# EAGLE board SparkFun_Energy_Harvester_Breakout-LTC3588_Panel_v12 (EAGLE 7.4.0), part 1 of 3
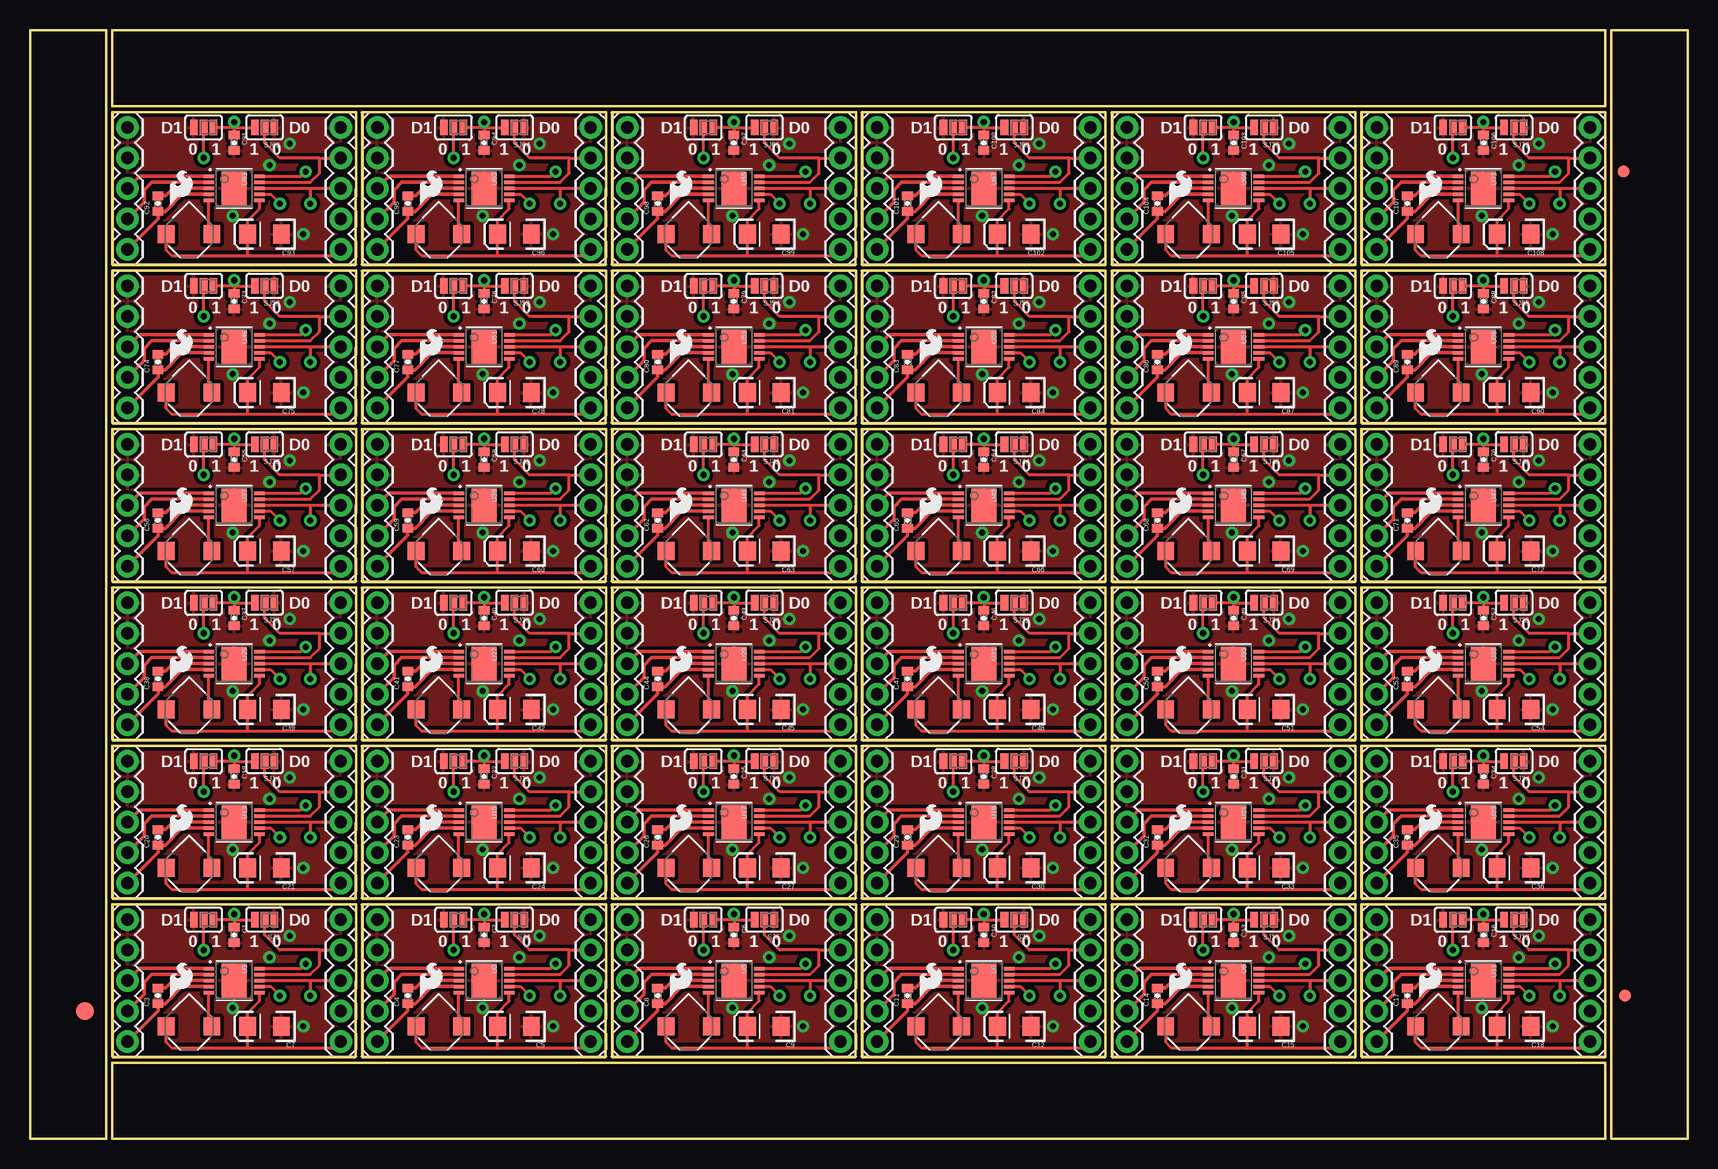
[diagram p0: board, top side]
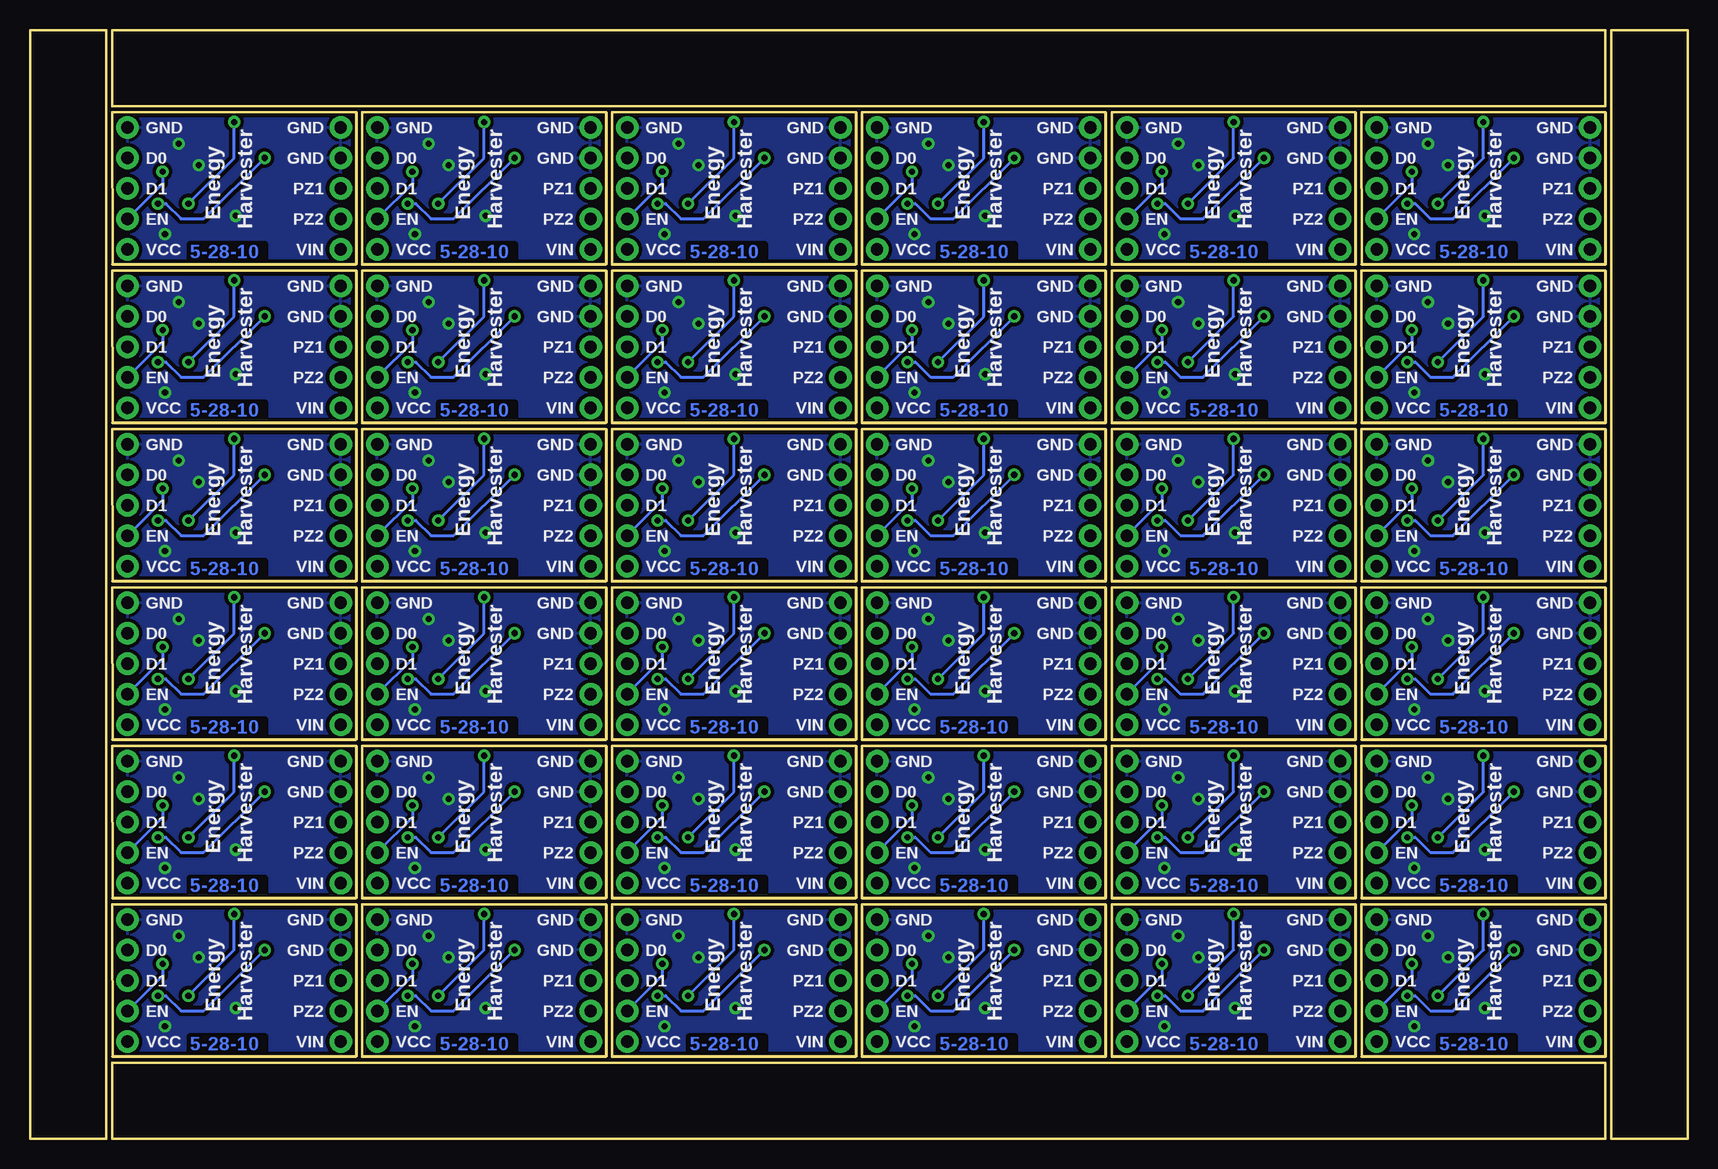
[diagram p1: board, bottom side, seen from below]

Size 138.18 x 92.46 mm. Coordinates in mm from the lower left corner, seen from the top.
Outline: 6.35,79.25 6.35,0 0,0 0,29.72
Outline: 0,27.18 0,92.46 6.35,92.46 6.35,76.71
Outline: 79.25,0 6.86,0 6.86,6.35 29.72,6.35
Outline: 27.18,6.35 131.32,6.35 131.32,0 76.71,0
Outline: 138.18,79.25 138.18,0 131.83,0 131.83,29.72
Outline: 131.83,27.18 131.83,92.46 138.18,92.46 138.18,76.71
Outline: 58.93,92.46 131.32,92.46 131.32,86.11 108.46,86.11
Outline: 111,86.11 6.86,86.11 6.86,92.46 61.47,92.46
Outline: 6.86,6.86 27.16,6.86 27.18,19.56 6.86,19.56 6.86,6.86
Outline: 27.69,6.86 47.99,6.86 48.01,19.56 27.69,19.56 27.69,6.86
Outline: 48.51,6.86 68.81,6.86 68.83,19.56 48.51,19.56 48.51,6.86
Outline: 69.34,6.86 89.64,6.86 89.66,19.56 69.34,19.56 69.34,6.86
Outline: 90.17,6.86 110.47,6.86 110.49,19.56 90.17,19.56 90.17,6.86
Outline: 111,6.86 131.3,6.86 131.32,19.56 111,19.56 111,6.86
Outline: 6.86,20.07 27.16,20.07 27.18,32.77 6.86,32.77 6.86,20.07
Outline: 27.69,20.07 47.99,20.07 48.01,32.77 27.69,32.77 27.69,20.07
Outline: 48.51,20.07 68.81,20.07 68.83,32.77 48.51,32.77 48.51,20.07
Outline: 69.34,20.07 89.64,20.07 89.66,32.77 69.34,32.77 69.34,20.07
Outline: 90.17,20.07 110.47,20.07 110.49,32.77 90.17,32.77 90.17,20.07
Outline: 111,20.07 131.3,20.07 131.32,32.77 111,32.77 111,20.07
Outline: 6.86,33.27 27.16,33.27 27.18,45.97 6.86,45.97 6.86,33.27
Outline: 27.69,33.27 47.99,33.27 48.01,45.97 27.69,45.97 27.69,33.27
Outline: 48.51,33.27 68.81,33.27 68.83,45.97 48.51,45.97 48.51,33.27
Outline: 69.34,33.27 89.64,33.27 89.66,45.97 69.34,45.97 69.34,33.27
Outline: 90.17,33.27 110.47,33.27 110.49,45.97 90.17,45.97 90.17,33.27
Outline: 111,33.27 131.3,33.27 131.32,45.97 111,45.97 111,33.27
Outline: 6.86,46.48 27.16,46.48 27.18,59.18 6.86,59.18 6.86,46.48
Outline: 27.69,46.48 47.99,46.48 48.01,59.18 27.69,59.18 27.69,46.48
Outline: 48.51,46.48 68.81,46.48 68.83,59.18 48.51,59.18 48.51,46.48
Outline: 69.34,46.48 89.64,46.48 89.66,59.18 69.34,59.18 69.34,46.48
Outline: 90.17,46.48 110.47,46.48 110.49,59.18 90.17,59.18 90.17,46.48
Outline: 111,46.48 131.3,46.48 131.32,59.18 111,59.18 111,46.48
Outline: 6.86,59.69 27.16,59.69 27.18,72.39 6.86,72.39 6.86,59.69
Outline: 27.69,59.69 47.99,59.69 48.01,72.39 27.69,72.39 27.69,59.69
Outline: 48.51,59.69 68.81,59.69 68.83,72.39 48.51,72.39 48.51,59.69
Outline: 69.34,59.69 89.64,59.69 89.66,72.39 69.34,72.39 69.34,59.69
Outline: 90.17,59.69 110.47,59.69 110.49,72.39 90.17,72.39 90.17,59.69
Outline: 111,59.69 131.3,59.69 131.32,72.39 111,72.39 111,59.69
Outline: 6.86,72.9 27.16,72.9 27.18,85.6 6.86,85.6 6.86,72.9
Outline: 27.69,72.9 47.99,72.9 48.01,85.6 27.69,85.6 27.69,72.9
Outline: 48.51,72.9 68.81,72.9 68.83,85.6 48.51,85.6 48.51,72.9
Outline: 69.34,72.9 89.64,72.9 89.66,85.6 69.34,85.6 69.34,72.9
Outline: 90.17,72.9 110.47,72.9 110.49,85.6 90.17,85.6 90.17,72.9
Outline: 111,72.9 131.3,72.9 131.32,85.6 111,85.6 111,72.9
Copper layers (1*16): Top 0.035mm / dielectric 1.5mm / Bottom 0.035mm
Design rules "SparkFun": minimum track width 8mil, minimum drill 20mil, track to track 8mil, track to pad 8mil, pad to pad 8mil, via to via 8mil, smd to smd 8mil, copper to edge 8mil, drill to drill 8mil, minimum pad ring 12mil, minimum via ring 10mil, stop-mask expansion 4mil, vias tented up to drill 20mil, thermal gap 10mil

## Footprints (pad centres in the part's own frame; a part is rotated, then mirrored left to right if it is on the bottom)
0402-CAP = smd 0.7 x 0.9: 1 -0.65,0; 2 0.65,0
EIA3216 = smd 1.4 x 1.6: A 1.4,0; C -1.4,0
FIDUCIAL-1.5X3 = smd 1.5 x 1.5: 1 0,0
FIDUCIAL-1X2 = smd 1 x 1: 1 0,0
1X05 = drill 1.016 pad 1.88: 1 0,0; 2 2.54,0; 3 5.08,0; 4 7.62,0; 5 10.16,0
SJ_3_PASTE2&3 = smd 0.635 x 1.27: 1 -0.813,0; 2 0,0; 3 0.813,0
SJ_3_PASTE1&2 = smd 0.635 x 1.27: 1 -0.813,0; 2 0,0; 3 0.813,0
MSOP-10-GNDPAD = smd 0.305 x 0.889: 1 -1,-2.11; 2 -0.5,-2.11; 3 0,-2.11; 4 0.5,-2.11; 5 1,-2.11; 6 1,2.11; 7 0.5,2.11; 8 0,2.11; 9 -0.5,2.11; 10 -1,2.11 | smd 2.794 x 2.083: GND 0,0
CDRH3D28 = smd 1.4 x 1.5: 1 -1.95,-0.007; 2 1.849,-0.007

## Placement (x,y rotation side)
C1  4.7uF  [0402-CAP]  17.02,17.02 270 top
C2  4.7uF  [0402-CAP]  37.85,17.02 270 top
C3  1uF  [0402-CAP]  10.67,11.94 90 top
C4  1uF  [0402-CAP]  31.5,11.94 90 top
C5  10uF  [EIA3216]  40.39,9.4 180 top
C6  4.7uF  [0402-CAP]  58.67,17.02 270 top
C7  10uF  [EIA3216]  19.56,9.4 180 top
C8  1uF  [0402-CAP]  52.32,11.94 90 top
C9  10uF  [EIA3216]  61.21,9.4 180 top
C10  4.7uF  [0402-CAP]  79.5,17.02 270 top
C11  1uF  [0402-CAP]  73.15,11.94 90 top
C12  10uF  [EIA3216]  82.04,9.4 180 top
C13  4.7uF  [0402-CAP]  100.33,17.02 270 top
C14  1uF  [0402-CAP]  93.98,11.94 90 top
C15  10uF  [EIA3216]  102.87,9.4 180 top
C16  4.7uF  [0402-CAP]  121.16,17.02 270 top
C17  1uF  [0402-CAP]  114.81,11.94 90 top
C18  10uF  [EIA3216]  123.7,9.4 180 top
C19  4.7uF  [0402-CAP]  17.02,30.23 270 top
C20  1uF  [0402-CAP]  10.67,25.15 90 top
C21  10uF  [EIA3216]  19.56,22.61 180 top
C22  4.7uF  [0402-CAP]  37.85,30.23 270 top
C23  1uF  [0402-CAP]  31.5,25.15 90 top
C24  10uF  [EIA3216]  40.39,22.61 180 top
C25  4.7uF  [0402-CAP]  58.67,30.23 270 top
C26  1uF  [0402-CAP]  52.32,25.15 90 top
C27  10uF  [EIA3216]  61.21,22.61 180 top
C28  4.7uF  [0402-CAP]  79.5,30.23 270 top
C29  1uF  [0402-CAP]  73.15,25.15 90 top
C30  10uF  [EIA3216]  82.04,22.61 180 top
C31  4.7uF  [0402-CAP]  100.33,30.23 270 top
C32  1uF  [0402-CAP]  93.98,25.15 90 top
C33  10uF  [EIA3216]  102.87,22.61 180 top
C34  4.7uF  [0402-CAP]  121.16,30.23 270 top
C35  1uF  [0402-CAP]  114.81,25.15 90 top
C36  10uF  [EIA3216]  123.7,22.61 180 top
C37  4.7uF  [0402-CAP]  17.02,43.43 270 top
C38  1uF  [0402-CAP]  10.67,38.35 90 top
C39  10uF  [EIA3216]  19.56,35.81 180 top
C40  4.7uF  [0402-CAP]  37.85,43.43 270 top
C41  1uF  [0402-CAP]  31.5,38.35 90 top
C42  10uF  [EIA3216]  40.39,35.81 180 top
C43  4.7uF  [0402-CAP]  58.67,43.43 270 top
C44  1uF  [0402-CAP]  52.32,38.35 90 top
C45  10uF  [EIA3216]  61.21,35.81 180 top
C46  4.7uF  [0402-CAP]  79.5,43.43 270 top
C47  1uF  [0402-CAP]  73.15,38.35 90 top
C48  10uF  [EIA3216]  82.04,35.81 180 top
C49  4.7uF  [0402-CAP]  100.33,43.43 270 top
C50  1uF  [0402-CAP]  93.98,38.35 90 top
C51  10uF  [EIA3216]  102.87,35.81 180 top
C52  4.7uF  [0402-CAP]  121.16,43.43 270 top
C53  1uF  [0402-CAP]  114.81,38.35 90 top
C54  10uF  [EIA3216]  123.7,35.81 180 top
C55  4.7uF  [0402-CAP]  17.02,56.64 270 top
C56  1uF  [0402-CAP]  10.67,51.56 90 top
C57  10uF  [EIA3216]  19.56,49.02 180 top
C58  4.7uF  [0402-CAP]  37.85,56.64 270 top
C59  1uF  [0402-CAP]  31.5,51.56 90 top
C60  10uF  [EIA3216]  40.39,49.02 180 top
C61  4.7uF  [0402-CAP]  58.67,56.64 270 top
C62  1uF  [0402-CAP]  52.32,51.56 90 top
C63  10uF  [EIA3216]  61.21,49.02 180 top
C64  4.7uF  [0402-CAP]  79.5,56.64 270 top
C65  1uF  [0402-CAP]  73.15,51.56 90 top
C66  10uF  [EIA3216]  82.04,49.02 180 top
C67  4.7uF  [0402-CAP]  100.33,56.64 270 top
C68  1uF  [0402-CAP]  93.98,51.56 90 top
C69  10uF  [EIA3216]  102.87,49.02 180 top
C70  4.7uF  [0402-CAP]  121.16,56.64 270 top
C71  1uF  [0402-CAP]  114.81,51.56 90 top
C72  10uF  [EIA3216]  123.7,49.02 180 top
C73  4.7uF  [0402-CAP]  17.02,69.85 270 top
C74  1uF  [0402-CAP]  10.67,64.77 90 top
C75  10uF  [EIA3216]  19.56,62.23 180 top
C76  4.7uF  [0402-CAP]  37.85,69.85 270 top
C77  1uF  [0402-CAP]  31.5,64.77 90 top
C78  10uF  [EIA3216]  40.39,62.23 180 top
C79  4.7uF  [0402-CAP]  58.67,69.85 270 top
C80  1uF  [0402-CAP]  52.32,64.77 90 top
C81  10uF  [EIA3216]  61.21,62.23 180 top
C82  4.7uF  [0402-CAP]  79.5,69.85 270 top
C83  1uF  [0402-CAP]  73.15,64.77 90 top
C84  10uF  [EIA3216]  82.04,62.23 180 top
C85  4.7uF  [0402-CAP]  100.33,69.85 270 top
C86  1uF  [0402-CAP]  93.98,64.77 90 top
C87  10uF  [EIA3216]  102.87,62.23 180 top
C88  4.7uF  [0402-CAP]  121.16,69.85 270 top
C89  1uF  [0402-CAP]  114.81,64.77 90 top
C90  10uF  [EIA3216]  123.7,62.23 180 top
C91  4.7uF  [0402-CAP]  17.02,83.06 270 top
C92  1uF  [0402-CAP]  10.67,77.98 90 top
C93  10uF  [EIA3216]  19.56,75.44 180 top
C94  4.7uF  [0402-CAP]  37.85,83.06 270 top
C95  1uF  [0402-CAP]  31.5,77.98 90 top
C96  10uF  [EIA3216]  40.39,75.44 180 top
C97  4.7uF  [0402-CAP]  58.67,83.06 270 top
C98  1uF  [0402-CAP]  52.32,77.98 90 top
C99  10uF  [EIA3216]  61.21,75.44 180 top
C100  4.7uF  [0402-CAP]  79.5,83.06 270 top
C101  1uF  [0402-CAP]  73.15,77.98 90 top
C102  10uF  [EIA3216]  82.04,75.44 180 top
C103  4.7uF  [0402-CAP]  100.33,83.06 270 top
C104  1uF  [0402-CAP]  93.98,77.98 90 top
C105  10uF  [EIA3216]  102.87,75.44 180 top
C106  4.7uF  [0402-CAP]  121.16,83.06 270 top
C107  1uF  [0402-CAP]  114.81,77.98 90 top
C108  10uF  [EIA3216]  123.7,75.44 180 top
E$1  [FIDUCIAL-1.5X3]  4.57,10.67 0 top
E$5  [FIDUCIAL-1X2]  132.97,11.94 0 top
E$7  [FIDUCIAL-1X2]  132.84,80.64 90 top
JP1  LOGO-SFESK  [SFE-LOGO-FLAME]  11.68,11.84 0 top
JP2  Control  [1X05]  25.91,8.13 90 top
JP3  Control  [1X05]  46.74,8.13 90 top
JP4  Input  [1X05]  8.13,8.13 90 top
JP5  Input  [1X05]  28.96,8.13 90 top
JP6  LOGO-SFESK  [SFE-LOGO-FLAME]  32.51,11.84 0 top
JP7  Control  [1X05]  67.56,8.13 90 top
JP8  Input  [1X05]  49.78,8.13 90 top
JP9  LOGO-SFESK  [SFE-LOGO-FLAME]  53.34,11.84 0 top
JP10  Control  [1X05]  88.39,8.13 90 top
JP11  Input  [1X05]  70.61,8.13 90 top
JP12  LOGO-SFESK  [SFE-LOGO-FLAME]  74.17,11.84 0 top
JP13  Control  [1X05]  109.22,8.13 90 top
JP14  Input  [1X05]  91.44,8.13 90 top
JP15  LOGO-SFESK  [SFE-LOGO-FLAME]  95,11.84 0 top
JP16  Control  [1X05]  130.05,8.13 90 top
JP17  Input  [1X05]  112.27,8.13 90 top
JP18  LOGO-SFESK  [SFE-LOGO-FLAME]  115.82,11.84 0 top
JP19  Control  [1X05]  25.91,21.34 90 top
JP20  Input  [1X05]  8.13,21.34 90 top
JP21  LOGO-SFESK  [SFE-LOGO-FLAME]  11.68,25.04 0 top
JP22  Control  [1X05]  46.74,21.34 90 top
JP23  Input  [1X05]  28.96,21.34 90 top
JP24  LOGO-SFESK  [SFE-LOGO-FLAME]  32.51,25.04 0 top
JP25  Control  [1X05]  67.56,21.34 90 top
JP26  Input  [1X05]  49.78,21.34 90 top
JP27  LOGO-SFESK  [SFE-LOGO-FLAME]  53.34,25.04 0 top
JP28  Control  [1X05]  88.39,21.34 90 top
JP29  Input  [1X05]  70.61,21.34 90 top
JP30  LOGO-SFESK  [SFE-LOGO-FLAME]  74.17,25.04 0 top
JP31  Control  [1X05]  109.22,21.34 90 top
JP32  Input  [1X05]  91.44,21.34 90 top
JP33  LOGO-SFESK  [SFE-LOGO-FLAME]  95,25.04 0 top
JP34  Control  [1X05]  130.05,21.34 90 top
JP35  Input  [1X05]  112.27,21.34 90 top
JP36  LOGO-SFESK  [SFE-LOGO-FLAME]  115.82,25.04 0 top
JP37  Control  [1X05]  25.91,34.54 90 top
JP38  Input  [1X05]  8.13,34.54 90 top
JP39  LOGO-SFESK  [SFE-LOGO-FLAME]  11.68,38.25 0 top
JP40  Control  [1X05]  46.74,34.54 90 top
JP41  Input  [1X05]  28.96,34.54 90 top
JP42  LOGO-SFESK  [SFE-LOGO-FLAME]  32.51,38.25 0 top
JP43  Control  [1X05]  67.56,34.54 90 top
JP44  Input  [1X05]  49.78,34.54 90 top
JP45  LOGO-SFESK  [SFE-LOGO-FLAME]  53.34,38.25 0 top
JP46  Control  [1X05]  88.39,34.54 90 top
JP47  Input  [1X05]  70.61,34.54 90 top
JP48  LOGO-SFESK  [SFE-LOGO-FLAME]  74.17,38.25 0 top
JP49  Control  [1X05]  109.22,34.54 90 top
JP50  Input  [1X05]  91.44,34.54 90 top
JP51  LOGO-SFESK  [SFE-LOGO-FLAME]  95,38.25 0 top
JP52  Control  [1X05]  130.05,34.54 90 top
JP53  Input  [1X05]  112.27,34.54 90 top
JP54  LOGO-SFESK  [SFE-LOGO-FLAME]  115.82,38.25 0 top
JP55  Control  [1X05]  25.91,47.75 90 top
JP56  Input  [1X05]  8.13,47.75 90 top
JP57  LOGO-SFESK  [SFE-LOGO-FLAME]  11.68,51.46 0 top
JP58  Control  [1X05]  46.74,47.75 90 top
JP59  Input  [1X05]  28.96,47.75 90 top
JP60  LOGO-SFESK  [SFE-LOGO-FLAME]  32.51,51.46 0 top
JP61  Control  [1X05]  67.56,47.75 90 top
JP62  Input  [1X05]  49.78,47.75 90 top
JP63  LOGO-SFESK  [SFE-LOGO-FLAME]  53.34,51.46 0 top
JP64  Control  [1X05]  88.39,47.75 90 top
JP65  Input  [1X05]  70.61,47.75 90 top
JP66  LOGO-SFESK  [SFE-LOGO-FLAME]  74.17,51.46 0 top
JP67  Control  [1X05]  109.22,47.75 90 top
JP68  Input  [1X05]  91.44,47.75 90 top
JP69  LOGO-SFESK  [SFE-LOGO-FLAME]  95,51.46 0 top
JP70  Control  [1X05]  130.05,47.75 90 top
JP71  Input  [1X05]  112.27,47.75 90 top
JP72  LOGO-SFESK  [SFE-LOGO-FLAME]  115.82,51.46 0 top
JP73  Control  [1X05]  25.91,60.96 90 top
JP74  Input  [1X05]  8.13,60.96 90 top
JP75  LOGO-SFESK  [SFE-LOGO-FLAME]  11.68,64.67 0 top
JP76  Control  [1X05]  46.74,60.96 90 top
JP77  Input  [1X05]  28.96,60.96 90 top
JP78  LOGO-SFESK  [SFE-LOGO-FLAME]  32.51,64.67 0 top
JP79  Control  [1X05]  67.56,60.96 90 top
JP80  Input  [1X05]  49.78,60.96 90 top
JP81  LOGO-SFESK  [SFE-LOGO-FLAME]  53.34,64.67 0 top
JP82  Control  [1X05]  88.39,60.96 90 top
JP83  Input  [1X05]  70.61,60.96 90 top
JP84  LOGO-SFESK  [SFE-LOGO-FLAME]  74.17,64.67 0 top
JP85  Control  [1X05]  109.22,60.96 90 top
JP86  Input  [1X05]  91.44,60.96 90 top
JP87  LOGO-SFESK  [SFE-LOGO-FLAME]  95,64.67 0 top
JP88  Control  [1X05]  130.05,60.96 90 top
JP89  Input  [1X05]  112.27,60.96 90 top
JP90  LOGO-SFESK  [SFE-LOGO-FLAME]  115.82,64.67 0 top
JP91  Control  [1X05]  25.91,74.17 90 top
JP92  Input  [1X05]  8.13,74.17 90 top
JP93  LOGO-SFESK  [SFE-LOGO-FLAME]  11.68,77.88 0 top
JP94  Control  [1X05]  46.74,74.17 90 top
JP95  Input  [1X05]  28.96,74.17 90 top
JP96  LOGO-SFESK  [SFE-LOGO-FLAME]  32.51,77.88 0 top
JP97  Control  [1X05]  67.56,74.17 90 top
JP98  Input  [1X05]  49.78,74.17 90 top
JP99  LOGO-SFESK  [SFE-LOGO-FLAME]  53.34,77.88 0 top
JP100  Control  [1X05]  88.39,74.17 90 top
JP101  Input  [1X05]  70.61,74.17 90 top
JP102  LOGO-SFESK  [SFE-LOGO-FLAME]  74.17,77.88 0 top
JP103  Control  [1X05]  109.22,74.17 90 top
JP104  Input  [1X05]  91.44,74.17 90 top
JP105  LOGO-SFESK  [SFE-LOGO-FLAME]  95,77.88 0 top
JP106  Control  [1X05]  130.05,74.17 90 top
JP107  Input  [1X05]  112.27,74.17 90 top
JP108  LOGO-SFESK  [SFE-LOGO-FLAME]  115.82,77.88 0 top
SJ1  D1  [SJ_3_PASTE2&3]  14.48,18.29 0 top
SJ2  D0  [SJ_3_PASTE1&2]  19.56,18.29 180 top
SJ3  D1  [SJ_3_PASTE2&3]  35.31,18.29 0 top
SJ4  D0  [SJ_3_PASTE1&2]  40.39,18.29 180 top
SJ5  D1  [SJ_3_PASTE2&3]  56.13,18.29 0 top
SJ6  D0  [SJ_3_PASTE1&2]  61.21,18.29 180 top
SJ7  D1  [SJ_3_PASTE2&3]  76.96,18.29 0 top
SJ8  D0  [SJ_3_PASTE1&2]  82.04,18.29 180 top
SJ9  D1  [SJ_3_PASTE2&3]  97.79,18.29 0 top
SJ10  D0  [SJ_3_PASTE1&2]  102.87,18.29 180 top
SJ11  D1  [SJ_3_PASTE2&3]  118.62,18.29 0 top
SJ12  D0  [SJ_3_PASTE1&2]  123.7,18.29 180 top
SJ13  D1  [SJ_3_PASTE2&3]  14.48,31.5 0 top
SJ14  D0  [SJ_3_PASTE1&2]  19.56,31.5 180 top
SJ15  D1  [SJ_3_PASTE2&3]  35.31,31.5 0 top
SJ16  D0  [SJ_3_PASTE1&2]  40.39,31.5 180 top
SJ17  D1  [SJ_3_PASTE2&3]  56.13,31.5 0 top
SJ18  D0  [SJ_3_PASTE1&2]  61.21,31.5 180 top
SJ19  D1  [SJ_3_PASTE2&3]  76.96,31.5 0 top
SJ20  D0  [SJ_3_PASTE1&2]  82.04,31.5 180 top
SJ21  D1  [SJ_3_PASTE2&3]  97.79,31.5 0 top
SJ22  D0  [SJ_3_PASTE1&2]  102.87,31.5 180 top
SJ23  D1  [SJ_3_PASTE2&3]  118.62,31.5 0 top
SJ24  D0  [SJ_3_PASTE1&2]  123.7,31.5 180 top
SJ25  D1  [SJ_3_PASTE2&3]  14.48,44.7 0 top
SJ26  D0  [SJ_3_PASTE1&2]  19.56,44.7 180 top
SJ27  D1  [SJ_3_PASTE2&3]  35.31,44.7 0 top
SJ28  D0  [SJ_3_PASTE1&2]  40.39,44.7 180 top
SJ29  D1  [SJ_3_PASTE2&3]  56.13,44.7 0 top
SJ30  D0  [SJ_3_PASTE1&2]  61.21,44.7 180 top
SJ31  D1  [SJ_3_PASTE2&3]  76.96,44.7 0 top
SJ32  D0  [SJ_3_PASTE1&2]  82.04,44.7 180 top
SJ33  D1  [SJ_3_PASTE2&3]  97.79,44.7 0 top
SJ34  D0  [SJ_3_PASTE1&2]  102.87,44.7 180 top
SJ35  D1  [SJ_3_PASTE2&3]  118.62,44.7 0 top
SJ36  D0  [SJ_3_PASTE1&2]  123.7,44.7 180 top
SJ37  D1  [SJ_3_PASTE2&3]  14.48,57.91 0 top
SJ38  D0  [SJ_3_PASTE1&2]  19.56,57.91 180 top
SJ39  D1  [SJ_3_PASTE2&3]  35.31,57.91 0 top
SJ40  D0  [SJ_3_PASTE1&2]  40.39,57.91 180 top
SJ41  D1  [SJ_3_PASTE2&3]  56.13,57.91 0 top
SJ42  D0  [SJ_3_PASTE1&2]  61.21,57.91 180 top
SJ43  D1  [SJ_3_PASTE2&3]  76.96,57.91 0 top
SJ44  D0  [SJ_3_PASTE1&2]  82.04,57.91 180 top
SJ45  D1  [SJ_3_PASTE2&3]  97.79,57.91 0 top
SJ46  D0  [SJ_3_PASTE1&2]  102.87,57.91 180 top
SJ47  D1  [SJ_3_PASTE2&3]  118.62,57.91 0 top
SJ48  D0  [SJ_3_PASTE1&2]  123.7,57.91 180 top
SJ49  D1  [SJ_3_PASTE2&3]  14.48,71.12 0 top
SJ50  D0  [SJ_3_PASTE1&2]  19.56,71.12 180 top
SJ51  D1  [SJ_3_PASTE2&3]  35.31,71.12 0 top
SJ52  D0  [SJ_3_PASTE1&2]  40.39,71.12 180 top
SJ53  D1  [SJ_3_PASTE2&3]  56.13,71.12 0 top
SJ54  D0  [SJ_3_PASTE1&2]  61.21,71.12 180 top
SJ55  D1  [SJ_3_PASTE2&3]  76.96,71.12 0 top
SJ56  D0  [SJ_3_PASTE1&2]  82.04,71.12 180 top
SJ57  D1  [SJ_3_PASTE2&3]  97.79,71.12 0 top
SJ58  D0  [SJ_3_PASTE1&2]  102.87,71.12 180 top
SJ59  D1  [SJ_3_PASTE2&3]  118.62,71.12 0 top
SJ60  D0  [SJ_3_PASTE1&2]  123.7,71.12 180 top
SJ61  D1  [SJ_3_PASTE2&3]  14.48,84.33 0 top
SJ62  D0  [SJ_3_PASTE1&2]  19.56,84.33 180 top
SJ63  D1  [SJ_3_PASTE2&3]  35.31,84.33 0 top
SJ64  D0  [SJ_3_PASTE1&2]  40.39,84.33 180 top
SJ65  D1  [SJ_3_PASTE2&3]  56.13,84.33 0 top
SJ66  D0  [SJ_3_PASTE1&2]  61.21,84.33 180 top
SJ67  D1  [SJ_3_PASTE2&3]  76.96,84.33 0 top
SJ68  D0  [SJ_3_PASTE1&2]  82.04,84.33 180 top
SJ69  D1  [SJ_3_PASTE2&3]  97.79,84.33 0 top
SJ70  D0  [SJ_3_PASTE1&2]  102.87,84.33 180 top
SJ71  D1  [SJ_3_PASTE2&3]  118.62,84.33 0 top
SJ72  D0  [SJ_3_PASTE1&2]  123.7,84.33 180 top
U1  LTC3588  [MSOP-10-GNDPAD]  17.02,13.21 270 top
U2  10uH  [CDRH3D28]  13.21,9.4 180 top
U3  LTC3588  [MSOP-10-GNDPAD]  37.85,13.21 270 top
U4  10uH  [CDRH3D28]  34.04,9.4 180 top
U5  LTC3588  [MSOP-10-GNDPAD]  58.67,13.21 270 top
U6  10uH  [CDRH3D28]  54.86,9.4 180 top
U7  LTC3588  [MSOP-10-GNDPAD]  79.5,13.21 270 top
U8  10uH  [CDRH3D28]  75.69,9.4 180 top
U9  LTC3588  [MSOP-10-GNDPAD]  100.33,13.21 270 top
U10  10uH  [CDRH3D28]  96.52,9.4 180 top
U11  LTC3588  [MSOP-10-GNDPAD]  121.16,13.21 270 top
U12  10uH  [CDRH3D28]  117.35,9.4 180 top
U13  LTC3588  [MSOP-10-GNDPAD]  17.02,26.42 270 top
U14  10uH  [CDRH3D28]  13.21,22.61 180 top
U15  LTC3588  [MSOP-10-GNDPAD]  37.85,26.42 270 top
U16  10uH  [CDRH3D28]  34.04,22.61 180 top
U17  LTC3588  [MSOP-10-GNDPAD]  58.67,26.42 270 top
U18  10uH  [CDRH3D28]  54.86,22.61 180 top
U19  LTC3588  [MSOP-10-GNDPAD]  79.5,26.42 270 top
U20  10uH  [CDRH3D28]  75.69,22.61 180 top
U21  LTC3588  [MSOP-10-GNDPAD]  100.33,26.42 270 top
U22  10uH  [CDRH3D28]  96.52,22.61 180 top
U23  LTC3588  [MSOP-10-GNDPAD]  121.16,26.42 270 top
U24  10uH  [CDRH3D28]  117.35,22.61 180 top
U25  LTC3588  [MSOP-10-GNDPAD]  17.02,39.62 270 top
U26  10uH  [CDRH3D28]  13.21,35.81 180 top
U27  LTC3588  [MSOP-10-GNDPAD]  37.85,39.62 270 top
U28  10uH  [CDRH3D28]  34.04,35.81 180 top
U29  LTC3588  [MSOP-10-GNDPAD]  58.67,39.62 270 top
U30  10uH  [CDRH3D28]  54.86,35.81 180 top
U31  LTC3588  [MSOP-10-GNDPAD]  79.5,39.62 270 top
U32  10uH  [CDRH3D28]  75.69,35.81 180 top
U33  LTC3588  [MSOP-10-GNDPAD]  100.33,39.62 270 top
U34  10uH  [CDRH3D28]  96.52,35.81 180 top
U35  LTC3588  [MSOP-10-GNDPAD]  121.16,39.62 270 top
U36  10uH  [CDRH3D28]  117.35,35.81 180 top
U37  LTC3588  [MSOP-10-GNDPAD]  17.02,52.83 270 top
U38  10uH  [CDRH3D28]  13.21,49.02 180 top
U39  LTC3588  [MSOP-10-GNDPAD]  37.85,52.83 270 top
U40  10uH  [CDRH3D28]  34.04,49.02 180 top
U41  LTC3588  [MSOP-10-GNDPAD]  58.67,52.83 270 top
U42  10uH  [CDRH3D28]  54.86,49.02 180 top
U43  LTC3588  [MSOP-10-GNDPAD]  79.5,52.83 270 top
U44  10uH  [CDRH3D28]  75.69,49.02 180 top
U45  LTC3588  [MSOP-10-GNDPAD]  100.33,52.83 270 top
U46  10uH  [CDRH3D28]  96.52,49.02 180 top
U47  LTC3588  [MSOP-10-GNDPAD]  121.16,52.83 270 top
U48  10uH  [CDRH3D28]  117.35,49.02 180 top
U49  LTC3588  [MSOP-10-GNDPAD]  17.02,66.04 270 top
U50  10uH  [CDRH3D28]  13.21,62.23 180 top
U51  LTC3588  [MSOP-10-GNDPAD]  37.85,66.04 270 top
U52  10uH  [CDRH3D28]  34.04,62.23 180 top
U53  LTC3588  [MSOP-10-GNDPAD]  58.67,66.04 270 top
U54  10uH  [CDRH3D28]  54.86,62.23 180 top
U55  LTC3588  [MSOP-10-GNDPAD]  79.5,66.04 270 top
U56  10uH  [CDRH3D28]  75.69,62.23 180 top
U57  LTC3588  [MSOP-10-GNDPAD]  100.33,66.04 270 top
U58  10uH  [CDRH3D28]  96.52,62.23 180 top
U59  LTC3588  [MSOP-10-GNDPAD]  121.16,66.04 270 top
U60  10uH  [CDRH3D28]  117.35,62.23 180 top
U61  LTC3588  [MSOP-10-GNDPAD]  17.02,79.25 270 top
U62  10uH  [CDRH3D28]  13.21,75.44 180 top
U63  LTC3588  [MSOP-10-GNDPAD]  37.85,79.25 270 top
U64  10uH  [CDRH3D28]  34.04,75.44 180 top
U65  LTC3588  [MSOP-10-GNDPAD]  58.67,79.25 270 top
U66  10uH  [CDRH3D28]  54.86,75.44 180 top
U67  LTC3588  [MSOP-10-GNDPAD]  79.5,79.25 270 top
U68  10uH  [CDRH3D28]  75.69,75.44 180 top
U69  LTC3588  [MSOP-10-GNDPAD]  100.33,79.25 270 top
U70  10uH  [CDRH3D28]  96.52,75.44 180 top
U71  LTC3588  [MSOP-10-GNDPAD]  121.16,79.25 270 top
U72  10uH  [CDRH3D28]  117.35,75.44 180 top

## Library data of the parts
C1-C108 JP1-JP108 SJ1-SJ72 U1-U72 = SparkFun
E$1 = SparkFun-Retired
E$5 E$7 = SparkFun-Aesthetics

## Nets
D0: JP2.4 SJ2.2 U1.9
D1: JP2.3 SJ1.2 U1.8
D2: JP3.3 SJ3.2 U3.8
D3: JP3.4 SJ4.2 U3.9
D4: JP7.3 SJ5.2 U5.8
D5: JP7.4 SJ6.2 U5.9
D6: JP10.3 SJ7.2 U7.8
D7: JP10.4 SJ8.2 U7.9
D8: JP13.3 SJ9.2 U9.8
D9: JP13.4 SJ10.2 U9.9
D10: JP16.3 SJ11.2 U11.8
D11: JP16.4 SJ12.2 U11.9
D12: JP19.3 SJ13.2 U13.8
D13: JP19.4 SJ14.2 U13.9
D14: JP22.3 SJ15.2 U15.8
D15: JP22.4 SJ16.2 U15.9
D16: JP25.3 SJ17.2 U17.8
D17: JP25.4 SJ18.2 U17.9
D18: JP28.3 SJ19.2 U19.8
D19: JP28.4 SJ20.2 U19.9
D20: JP31.3 SJ21.2 U21.8
D21: JP31.4 SJ22.2 U21.9
D22: JP34.3 SJ23.2 U23.8
D23: JP34.4 SJ24.2 U23.9
D24: JP37.3 SJ25.2 U25.8
D25: JP37.4 SJ26.2 U25.9
D26: JP40.3 SJ27.2 U27.8
D27: JP40.4 SJ28.2 U27.9
D28: JP43.3 SJ29.2 U29.8
D29: JP43.4 SJ30.2 U29.9
D30: JP46.3 SJ31.2 U31.8
D31: JP46.4 SJ32.2 U31.9
D32: JP49.3 SJ33.2 U33.8
D33: JP49.4 SJ34.2 U33.9
D34: JP52.3 SJ35.2 U35.8
D35: JP52.4 SJ36.2 U35.9
D36: JP55.3 SJ37.2 U37.8
D37: JP55.4 SJ38.2 U37.9
D38: JP58.3 SJ39.2 U39.8
D39: JP58.4 SJ40.2 U39.9
D40: JP61.3 SJ41.2 U41.8
D41: JP61.4 SJ42.2 U41.9
D42: JP64.3 SJ43.2 U43.8
D43: JP64.4 SJ44.2 U43.9
D44: JP67.3 SJ45.2 U45.8
D45: JP67.4 SJ46.2 U45.9
D46: JP70.3 SJ47.2 U47.8
D47: JP70.4 SJ48.2 U47.9
D48: JP73.3 SJ49.2 U49.8
D49: JP73.4 SJ50.2 U49.9
D50: JP76.3 SJ51.2 U51.8
D51: JP76.4 SJ52.2 U51.9
D52: JP79.3 SJ53.2 U53.8
D53: JP79.4 SJ54.2 U53.9
D54: JP82.3 SJ55.2 U55.8
D55: JP82.4 SJ56.2 U55.9
D56: JP85.3 SJ57.2 U57.8
D57: JP85.4 SJ58.2 U57.9
D58: JP88.3 SJ59.2 U59.8
D59: JP88.4 SJ60.2 U59.9
D60: JP91.3 SJ61.2 U61.8
D61: JP91.4 SJ62.2 U61.9
D62: JP94.3 SJ63.2 U63.8
D63: JP94.4 SJ64.2 U63.9
D64: JP97.3 SJ65.2 U65.8
D65: JP97.4 SJ66.2 U65.9
D66: JP100.3 SJ67.2 U67.8
D67: JP100.4 SJ68.2 U67.9
D68: JP103.3 SJ69.2 U69.8
D69: JP103.4 SJ70.2 U69.9
D70: JP106.3 SJ71.2 U71.8
D71: JP106.4 SJ72.2 U71.9
EN: JP2.2 U1.10
EN1: JP3.2 U3.10
EN2: JP7.2 U5.10
EN3: JP10.2 U7.10
EN4: JP13.2 U9.10
EN5: JP16.2 U11.10
EN6: JP19.2 U13.10
EN7: JP22.2 U15.10
EN8: JP25.2 U17.10
EN9: JP28.2 U19.10
EN10: JP31.2 U21.10
EN11: JP34.2 U23.10
EN12: JP37.2 U25.10
EN13: JP40.2 U27.10
EN14: JP43.2 U29.10
EN15: JP46.2 U31.10
EN16: JP49.2 U33.10
EN17: JP52.2 U35.10
EN18: JP55.2 U37.10
EN19: JP58.2 U39.10
EN20: JP61.2 U41.10
EN21: JP64.2 U43.10
EN22: JP67.2 U45.10
EN23: JP70.2 U47.10
EN24: JP73.2 U49.10
EN25: JP76.2 U51.10
EN26: JP79.2 U53.10
EN27: JP82.2 U55.10
EN28: JP85.2 U57.10
EN29: JP88.2 U59.10
EN30: JP91.2 U61.10
EN31: JP94.2 U63.10
EN32: JP97.2 U65.10
EN33: JP100.2 U67.10
EN34: JP103.2 U69.10
EN35: JP106.2 U71.10
GND: C1.2 C7.C JP2.5 JP4.4 JP4.5 SJ1.1 SJ2.1 U1.GND
GND1: C2.2 C5.C JP3.5 JP5.4 JP5.5 SJ3.1 SJ4.1 U3.GND
GND2: C6.2 C9.C JP7.5 JP8.4 JP8.5 SJ5.1 SJ6.1 U5.GND
GND3: C10.2 C12.C JP10.5 JP11.4 JP11.5 SJ7.1 SJ8.1 U7.GND
GND4: C13.2 C15.C JP13.5 JP14.4 JP14.5 SJ9.1 SJ10.1 U9.GND
GND5: C16.2 C18.C JP16.5 JP17.4 JP17.5 SJ11.1 SJ12.1 U11.GND
GND6: C19.2 C21.C JP19.5 JP20.4 JP20.5 SJ13.1 SJ14.1 U13.GND
GND7: C22.2 C24.C JP22.5 JP23.4 JP23.5 SJ15.1 SJ16.1 U15.GND
GND8: C25.2 C27.C JP25.5 JP26.4 JP26.5 SJ17.1 SJ18.1 U17.GND
GND9: C28.2 C30.C JP28.5 JP29.4 JP29.5 SJ19.1 SJ20.1 U19.GND
GND10: C31.2 C33.C JP31.5 JP32.4 JP32.5 SJ21.1 SJ22.1 U21.GND
GND11: C34.2 C36.C JP34.5 JP35.4 JP35.5 SJ23.1 SJ24.1 U23.GND
GND12: C37.2 C39.C JP37.5 JP38.4 JP38.5 SJ25.1 SJ26.1 U25.GND
GND13: C40.2 C42.C JP40.5 JP41.4 JP41.5 SJ27.1 SJ28.1 U27.GND
GND14: C43.2 C45.C JP43.5 JP44.4 JP44.5 SJ29.1 SJ30.1 U29.GND
GND15: C46.2 C48.C JP46.5 JP47.4 JP47.5 SJ31.1 SJ32.1 U31.GND
GND16: C49.2 C51.C JP49.5 JP50.4 JP50.5 SJ33.1 SJ34.1 U33.GND
GND17: C52.2 C54.C JP52.5 JP53.4 JP53.5 SJ35.1 SJ36.1 U35.GND
GND18: C55.2 C57.C JP55.5 JP56.4 JP56.5 SJ37.1 SJ38.1 U37.GND
GND19: C58.2 C60.C JP58.5 JP59.4 JP59.5 SJ39.1 SJ40.1 U39.GND
GND20: C61.2 C63.C JP61.5 JP62.4 JP62.5 SJ41.1 SJ42.1 U41.GND
GND21: C64.2 C66.C JP64.5 JP65.4 JP65.5 SJ43.1 SJ44.1 U43.GND
GND22: C67.2 C69.C JP67.5 JP68.4 JP68.5 SJ45.1 SJ46.1 U45.GND
GND23: C70.2 C72.C JP70.5 JP71.4 JP71.5 SJ47.1 SJ48.1 U47.GND
GND24: C73.2 C75.C JP73.5 JP74.4 JP74.5 SJ49.1 SJ50.1 U49.GND
GND25: C76.2 C78.C JP76.5 JP77.4 JP77.5 SJ51.1 SJ52.1 U51.GND
GND26: C79.2 C81.C JP79.5 JP80.4 JP80.5 SJ53.1 SJ54.1 U53.GND
GND27: C82.2 C84.C JP82.5 JP83.4 JP83.5 SJ55.1 SJ56.1 U55.GND
GND28: C85.2 C87.C JP85.5 JP86.4 JP86.5 SJ57.1 SJ58.1 U57.GND
GND29: C88.2 C90.C JP88.5 JP89.4 JP89.5 SJ59.1 SJ60.1 U59.GND
GND30: C91.2 C93.C JP91.5 JP92.4 JP92.5 SJ61.1 SJ62.1 U61.GND
GND31: C94.2 C96.C JP94.5 JP95.4 JP95.5 SJ63.1 SJ64.1 U63.GND
GND32: C97.2 C99.C JP97.5 JP98.4 JP98.5 SJ65.1 SJ66.1 U65.GND
GND33: C100.2 C102.C JP100.5 JP101.4 JP101.5 SJ67.1 SJ68.1 U67.GND
GND34: C103.2 C105.C JP103.5 JP104.4 JP104.5 SJ69.1 SJ70.1 U69.GND
GND35: C106.2 C108.C JP106.5 JP107.4 JP107.5 SJ71.1 SJ72.1 U71.GND
N$1: C4.2 U3.3
N$2: C3.2 U1.3
N$3: U3.5 U4.1
N$4: C8.2 U5.3
N$5: U5.5 U6.1
N$6: U1.5 U2.1
N$7: C11.2 U7.3
N$8: U7.5 U8.1
N$9: C14.2 U9.3
N$10: U9.5 U10.1
N$11: C17.2 U11.3
N$12: U11.5 U12.1
N$13: C20.2 U13.3
N$14: U13.5 U14.1
N$15: C23.2 U15.3
N$16: U15.5 U16.1
N$17: C26.2 U17.3
N$18: U17.5 U18.1
N$19: C29.2 U19.3
N$20: U19.5 U20.1
N$21: C32.2 U21.3
N$22: U21.5 U22.1
N$23: C35.2 U23.3
N$24: U23.5 U24.1
N$25: C38.2 U25.3
N$26: U25.5 U26.1
N$27: C41.2 U27.3
N$28: U27.5 U28.1
N$29: C44.2 U29.3
N$30: U29.5 U30.1
N$31: C47.2 U31.3
N$32: U31.5 U32.1
N$33: C50.2 U33.3
N$34: U33.5 U34.1
N$35: C53.2 U35.3
N$36: U35.5 U36.1
N$37: C56.2 U37.3
N$38: U37.5 U38.1
N$39: C59.2 U39.3
N$40: U39.5 U40.1
N$41: C62.2 U41.3
N$42: U41.5 U42.1
N$43: C65.2 U43.3
N$44: U43.5 U44.1
N$45: C68.2 U45.3
N$46: U45.5 U46.1
N$47: C71.2 U47.3
N$48: U47.5 U48.1
N$49: C74.2 U49.3
N$50: U49.5 U50.1
N$51: C77.2 U51.3
N$52: U51.5 U52.1
N$53: C80.2 U53.3
N$54: U53.5 U54.1
N$55: C83.2 U55.3
N$56: U55.5 U56.1
N$57: C86.2 U57.3
N$58: U57.5 U58.1
N$59: C89.2 U59.3
N$60: U59.5 U60.1
N$61: C92.2 U61.3
N$62: U61.5 U62.1
N$63: C95.2 U63.3
N$64: U63.5 U64.1
N$65: C98.2 U65.3
N$66: U65.5 U66.1
N$67: C101.2 U67.3
N$68: U67.5 U68.1
N$69: C104.2 U69.3
N$70: U69.5 U70.1
N$71: C107.2 U71.3
N$72: U71.5 U72.1
PZ1: JP4.3 U1.1
PZ2: JP4.2 U1.2
PZ3: JP5.2 U3.2
PZ4: JP5.3 U3.1
PZ5: JP8.2 U5.2
PZ6: JP8.3 U5.1
PZ7: JP11.2 U7.2
PZ8: JP11.3 U7.1
PZ9: JP14.2 U9.2
PZ10: JP14.3 U9.1
PZ11: JP17.2 U11.2
PZ12: JP17.3 U11.1
PZ13: JP20.2 U13.2
PZ14: JP20.3 U13.1
PZ15: JP23.2 U15.2
PZ16: JP23.3 U15.1
PZ17: JP26.2 U17.2
PZ18: JP26.3 U17.1
PZ19: JP29.2 U19.2
PZ20: JP29.3 U19.1
PZ21: JP32.2 U21.2
PZ22: JP32.3 U21.1
PZ23: JP35.2 U23.2
PZ24: JP35.3 U23.1
PZ25: JP38.2 U25.2
PZ26: JP38.3 U25.1
PZ27: JP41.2 U27.2
PZ28: JP41.3 U27.1
PZ29: JP44.2 U29.2
PZ30: JP44.3 U29.1
PZ31: JP47.2 U31.2
PZ32: JP47.3 U31.1
PZ33: JP50.2 U33.2
PZ34: JP50.3 U33.1
PZ35: JP53.2 U35.2
PZ36: JP53.3 U35.1
PZ37: JP56.2 U37.2
PZ38: JP56.3 U37.1
PZ39: JP59.2 U39.2
PZ40: JP59.3 U39.1
PZ41: JP62.2 U41.2
PZ42: JP62.3 U41.1
PZ43: JP65.2 U43.2
PZ44: JP65.3 U43.1
PZ45: JP68.2 U45.2
PZ46: JP68.3 U45.1
PZ47: JP71.2 U47.2
PZ48: JP71.3 U47.1
PZ49: JP74.2 U49.2
PZ50: JP74.3 U49.1
PZ51: JP77.2 U51.2
PZ52: JP77.3 U51.1
PZ53: JP80.2 U53.2
PZ54: JP80.3 U53.1
PZ55: JP83.2 U55.2
PZ56: JP83.3 U55.1
PZ57: JP86.2 U57.2
PZ58: JP86.3 U57.1
PZ59: JP89.2 U59.2
PZ60: JP89.3 U59.1
PZ61: JP92.2 U61.2
PZ62: JP92.3 U61.1
PZ63: JP95.2 U63.2
PZ64: JP95.3 U63.1
PZ65: JP98.2 U65.2
PZ66: JP98.3 U65.1
PZ67: JP101.2 U67.2
PZ68: JP101.3 U67.1
PZ69: JP104.2 U69.2
PZ70: JP104.3 U69.1
PZ71: JP107.2 U71.2
PZ72: JP107.3 U71.1
VCC: C7.A JP2.1 U1.6 U2.2
VCC1: C5.A JP3.1 U3.6 U4.2
VCC2: C9.A JP7.1 U5.6 U6.2
VCC3: C12.A JP10.1 U7.6 U8.2
VCC4: C15.A JP13.1 U9.6 U10.2
VCC5: C18.A JP16.1 U11.6 U12.2
VCC6: C21.A JP19.1 U13.6 U14.2
VCC7: C24.A JP22.1 U15.6 U16.2
VCC8: C27.A JP25.1 U17.6 U18.2
VCC9: C30.A JP28.1 U19.6 U20.2
VCC10: C33.A JP31.1 U21.6 U22.2
VCC11: C36.A JP34.1 U23.6 U24.2
VCC12: C39.A JP37.1 U25.6 U26.2
VCC13: C42.A JP40.1 U27.6 U28.2
VCC14: C45.A JP43.1 U29.6 U30.2
VCC15: C48.A JP46.1 U31.6 U32.2
VCC16: C51.A JP49.1 U33.6 U34.2
VCC17: C54.A JP52.1 U35.6 U36.2
VCC18: C57.A JP55.1 U37.6 U38.2
VCC19: C60.A JP58.1 U39.6 U40.2
VCC20: C63.A JP61.1 U41.6 U42.2
VCC21: C66.A JP64.1 U43.6 U44.2
VCC22: C69.A JP67.1 U45.6 U46.2
VCC23: C72.A JP70.1 U47.6 U48.2
VCC24: C75.A JP73.1 U49.6 U50.2
VCC25: C78.A JP76.1 U51.6 U52.2
VCC26: C81.A JP79.1 U53.6 U54.2
VCC27: C84.A JP82.1 U55.6 U56.2
VCC28: C87.A JP85.1 U57.6 U58.2
VCC29: C90.A JP88.1 U59.6 U60.2
VCC30: C93.A JP91.1 U61.6 U62.2
VCC31: C96.A JP94.1 U63.6 U64.2
VCC32: C99.A JP97.1 U65.6 U66.2
VCC33: C102.A JP100.1 U67.6 U68.2
VCC34: C105.A JP103.1 U69.6 U70.2
VCC35: C108.A JP106.1 U71.6 U72.2
VIN: C3.1 JP4.1 U1.4
VIN1: C2.1 SJ3.3 SJ4.3 U3.7
VIN2: C1.1 SJ1.3 SJ2.3 U1.7
VIN3: C4.1 JP5.1 U3.4
VIN4: C6.1 SJ5.3 SJ6.3 U5.7
VIN5: C8.1 JP8.1 U5.4
VIN6: C10.1 SJ7.3 SJ8.3 U7.7
VIN7: C11.1 JP11.1 U7.4
VIN8: C13.1 SJ9.3 SJ10.3 U9.7
VIN9: C14.1 JP14.1 U9.4
VIN10: C16.1 SJ11.3 SJ12.3 U11.7
VIN11: C17.1 JP17.1 U11.4
VIN12: C19.1 SJ13.3 SJ14.3 U13.7
VIN13: C20.1 JP20.1 U13.4
VIN14: C22.1 SJ15.3 SJ16.3 U15.7
VIN15: C23.1 JP23.1 U15.4
VIN16: C25.1 SJ17.3 SJ18.3 U17.7
VIN17: C26.1 JP26.1 U17.4
VIN18: C28.1 SJ19.3 SJ20.3 U19.7
VIN19: C29.1 JP29.1 U19.4
VIN20: C31.1 SJ21.3 SJ22.3 U21.7
VIN21: C32.1 JP32.1 U21.4
VIN22: C34.1 SJ23.3 SJ24.3 U23.7
VIN23: C35.1 JP35.1 U23.4
VIN24: C37.1 SJ25.3 SJ26.3 U25.7
VIN25: C38.1 JP38.1 U25.4
VIN26: C40.1 SJ27.3 SJ28.3 U27.7
VIN27: C41.1 JP41.1 U27.4
VIN28: C43.1 SJ29.3 SJ30.3 U29.7
VIN29: C44.1 JP44.1 U29.4
VIN30: C46.1 SJ31.3 SJ32.3 U31.7
VIN31: C47.1 JP47.1 U31.4
VIN32: C49.1 SJ33.3 SJ34.3 U33.7
VIN33: C50.1 JP50.1 U33.4
VIN34: C52.1 SJ35.3 SJ36.3 U35.7
VIN35: C53.1 JP53.1 U35.4
VIN36: C55.1 SJ37.3 SJ38.3 U37.7
VIN37: C56.1 JP56.1 U37.4
VIN38: C58.1 SJ39.3 SJ40.3 U39.7
VIN39: C59.1 JP59.1 U39.4
VIN40: C61.1 SJ41.3 SJ42.3 U41.7
VIN41: C62.1 JP62.1 U41.4
VIN42: C64.1 SJ43.3 SJ44.3 U43.7
VIN43: C65.1 JP65.1 U43.4
VIN44: C67.1 SJ45.3 SJ46.3 U45.7
VIN45: C68.1 JP68.1 U45.4
VIN46: C70.1 SJ47.3 SJ48.3 U47.7
VIN47: C71.1 JP71.1 U47.4
VIN48: C73.1 SJ49.3 SJ50.3 U49.7
VIN49: C74.1 JP74.1 U49.4
VIN50: C76.1 SJ51.3 SJ52.3 U51.7
VIN51: C77.1 JP77.1 U51.4
VIN52: C79.1 SJ53.3 SJ54.3 U53.7
VIN53: C80.1 JP80.1 U53.4
VIN54: C82.1 SJ55.3 SJ56.3 U55.7
VIN55: C83.1 JP83.1 U55.4
VIN56: C85.1 SJ57.3 SJ58.3 U57.7
VIN57: C86.1 JP86.1 U57.4
VIN58: C88.1 SJ59.3 SJ60.3 U59.7
VIN59: C89.1 JP89.1 U59.4
VIN60: C91.1 SJ61.3 SJ62.3 U61.7
VIN61: C92.1 JP92.1 U61.4
VIN62: C94.1 SJ63.3 SJ64.3 U63.7
VIN63: C95.1 JP95.1 U63.4
VIN64: C97.1 SJ65.3 SJ66.3 U65.7
VIN65: C98.1 JP98.1 U65.4
VIN66: C100.1 SJ67.3 SJ68.3 U67.7
VIN67: C101.1 JP101.1 U67.4
VIN68: C103.1 SJ69.3 SJ70.3 U69.7
VIN69: C104.1 JP104.1 U69.4
VIN70: C106.1 SJ71.3 SJ72.3 U71.7
VIN71: C107.1 JP107.1 U71.4